# Altium PCB QiTian Mini Remote Control.PcbDoc
Units mm, origin at the board's own origin, x right, y up, seen from the top; angles counter-clockwise.
Board outline 136.4 x 81.28 mm, 2 copper layers (Top Layer, Bottom Layer); 32 components, 21 nets, 128 pads, 9 vias.
Unrouted connection lines stored in the file: 2.
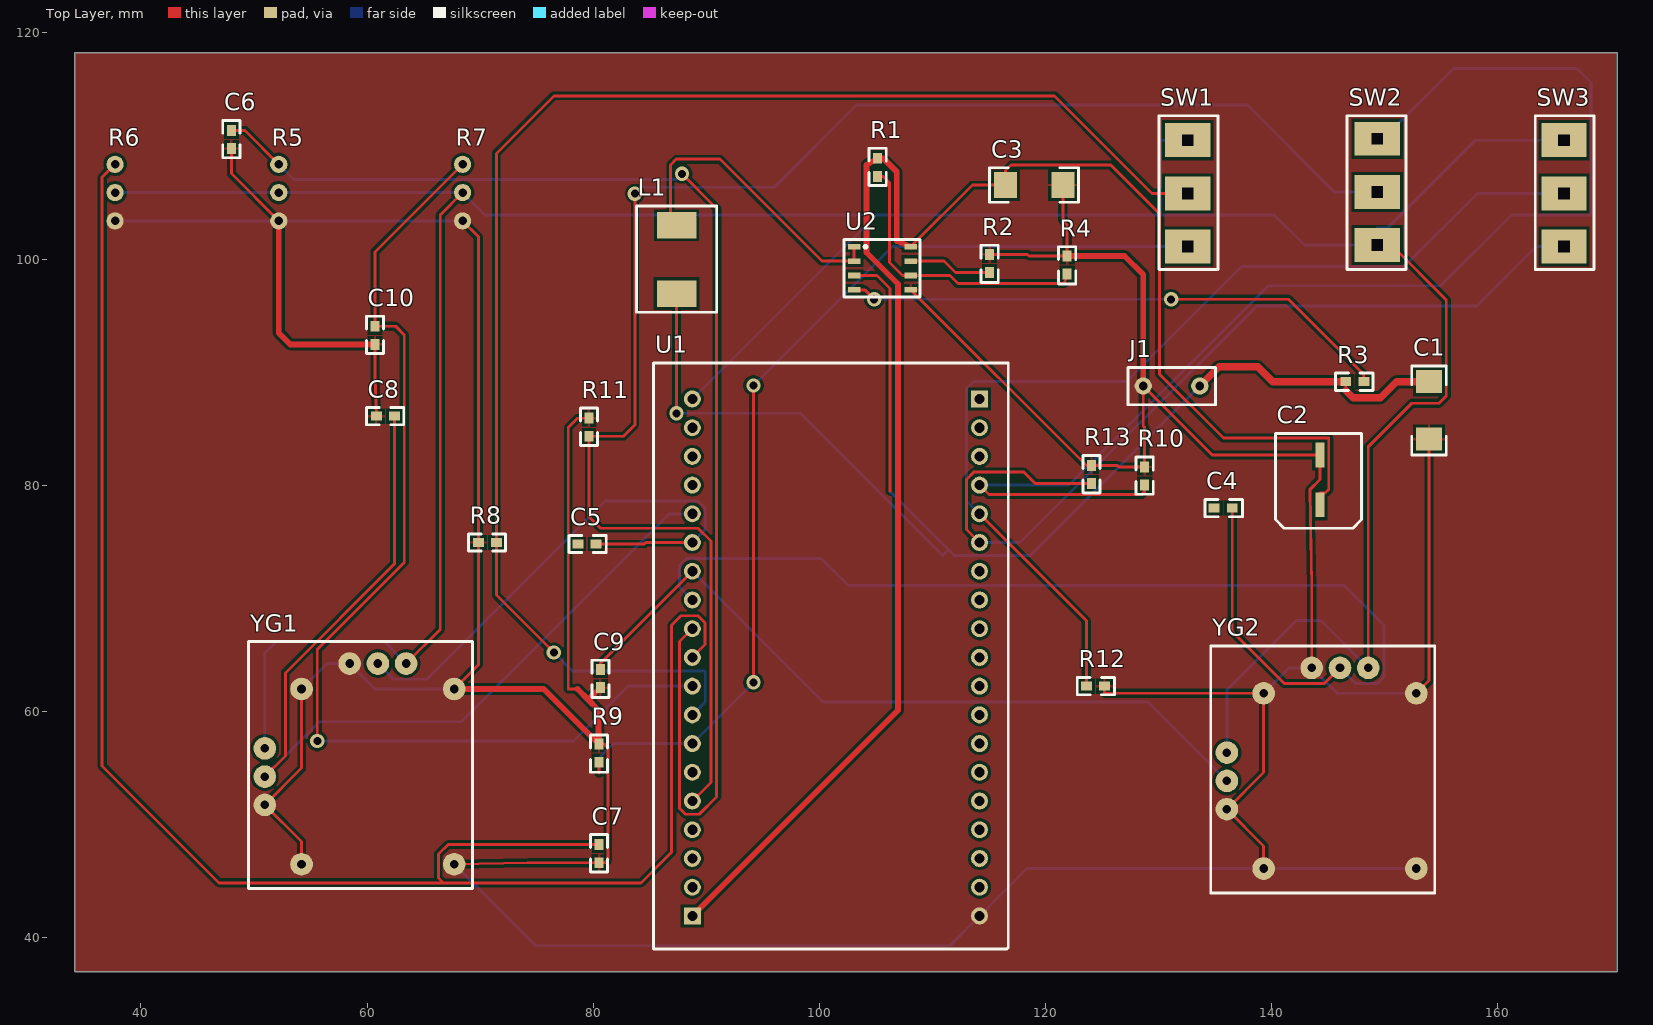
[diagram p0: Top Layer view]
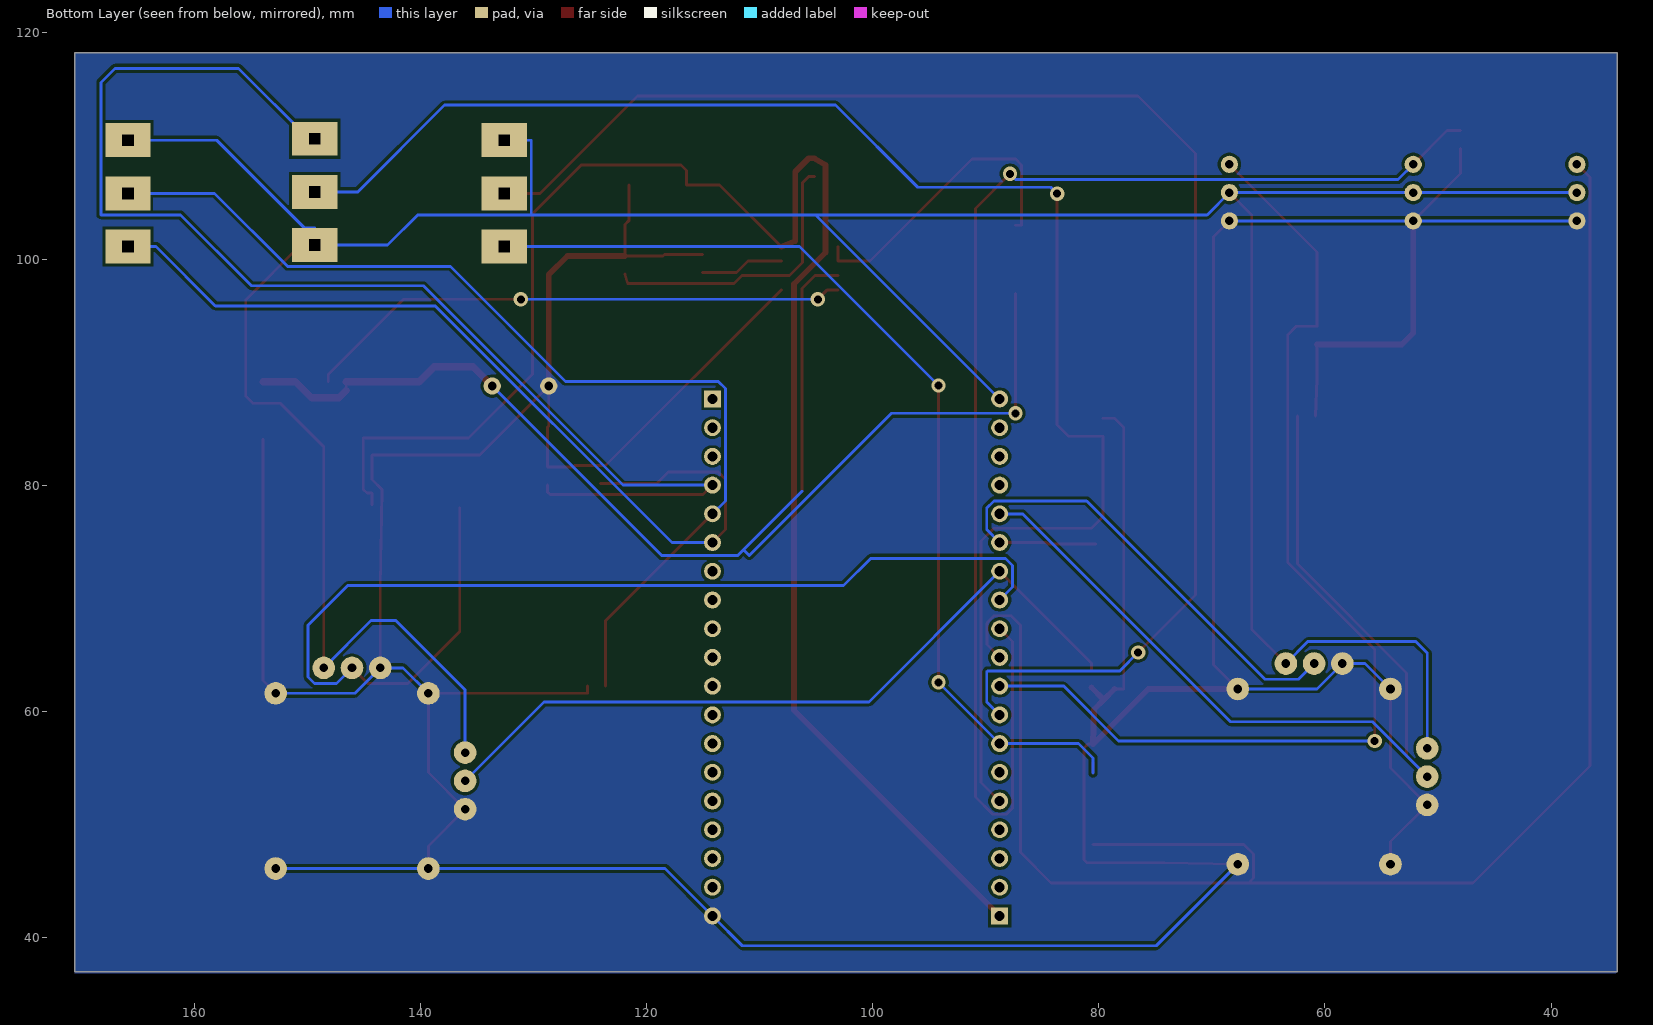
[diagram p1: Bottom Layer view, seen from below]

## Layer stack, top to bottom
Top Solder: solder mask 0.0102, Solder Resist, Dk 3.5
Top Layer: signal copper 0.0356
Dielectric 1: dielectric 0.32, FR-4, Dk 4.8
Bottom Layer: signal copper 0.0356
Bottom Solder: solder mask 0.0102, Solder Resist, Dk 3.5

## Board outline
34.163,36.957 170.561,36.957 170.561,118.237 34.163,118.237

## Design rules (kind name [scope] priority, off if disabled: settings)
Clearance [All] p1: gap=0.254 ignorepadtopadclearanceinfootprint=FALSE except(0: Arc-Hole Track-Hole SMDPad-Hole THPad-Hole Via-Hole Fill-Hole Poly-Hole Region-Hole Text-Hole)
PolygonConnect [All] p1: thpad.connectstyle=Direct thpad.reliefconductorwidth=0.254 thpad.reliefentries=4 thpad.polygonreliefangle="90 Angle" thpad.airgapwidth=0.254 smdpad.connectstyle=Relief smdpad.reliefconductorwidth=0.254 smdpad.reliefentries=4 smdpad.polygonreliefangle="90 Angle" smdpad.airgapwidth=0.254 via.connectstyle=Direct via.reliefconductorwidth=0.254 via.reliefentries=4 via.polygonreliefangle="90 Angle" via.airgapwidth=0.254
RoutingVias [All] p1: holewidth=0.711 width=1.27 viastyle="Through Hole" minholewidth=0.711 minwidth=1.27 maxholewidth=0.711 maxwidth=1.27
SolderMaskExpansion [All] p1: expansion=0.102 istentingtop=FALSE
Width Width_VCC [InNet('VCC')] p1: maxlimit=0.762 minlimit=0.254 preferedwidth=0.508
Width Width_GND [InNet('GND')] p2: maxlimit=0.762 minlimit=0.254 preferedwidth=0.508
Width Width_3.3V [InNet('3.3V')] p3: maxlimit=0.762 minlimit=0.254 preferedwidth=0.508
Width Width_5V [InNet('5V')] p4: maxlimit=0.762 minlimit=0.254 preferedwidth=0.508
Width [All] p5: maxlimit=0.254 minlimit=0.254 preferedwidth=0.254
30 further rules are at their usual default settings.

## Components (designator, comment, footprint, x,y, rotation, side; value= is the part's Value field where it differs from the comment)
C1 "22μF" 6032 153.924,89.154 r270 top
C2 "100μF" 63_54 144.272,82.677 r180 top
C3 "22μF" 6032 121.539,106.553 r180 top
C4 "0.1μF" 0603 136.525,77.978 r180 top
C5 "0.1μF" 0603 80.264,74.803 r180 top
C6 "0.1μF" 0603 48.006,111.379 r270 top
C7 "0.1μF" 0603 80.518,48.209 r270 top
C8 "0.1μF" 0603 60.833,86.106 r0 top
C9 "0.1μF" 0603 80.645,62.103 r90 top
C10 "0.1μF" 0603 60.706,94.056 r270 top
J1 "J_2" J_2 133.651,88.773 r180 top
L1 "3.3μH" 0630 87.376,96.947 r90 top
R1 "73K" 0603 105.156,108.915 r270 top
R2 "28K" 0603 115.062,98.806 r90 top
R3 "100K" 0603 146.558,89.154 r0 top
R4 "10K" 0603 121.92,98.679 r90 top
R5 "RH" RH3 52.197,103.378 r90 top
R6 "RH" RH3 37.719,103.378 r90 top
R7 "RH" RH3 68.453,103.378 r90 top
R8 "10K" 0603 69.85,74.93 r0 top
R9 "10K" 0603 80.518,55.499 r90 top
R10 "10K" 0603 128.778,81.61 r270 top
R11 "10K" 0603 79.629,85.928 r270 top
R12 "10K" 0603 125.222,62.23 r180 top
R13 "10K" 0603 124.079,81.737 r270 top
SW1 "SW_3" SW3 132.588,110.514 r270 top
SW2 "SW_3" SW3 149.352,101.243 r90 top
SW3 "SW_3" SW3 165.862,110.514 r270 top
U1 "ESP32" ESP32 101.854,64.262 r0 top
U2 "FP6277" FP6277 103.077,101.092 r270 top
YG1 "YG" YG 60.96,54.229 r0 top
YG2 "YG" YG 146.05,53.848 r0 top

## Footprints (in the part's own frame and the unit in brackets; to place one, negate y for a bottom-side part, rotate by r counter-clockwise, add the part's x,y. Pads: shape width x height; smd on the part's side, far side on the other; paste and mask are expansions set on the pad)
63_54 [mm] "6.3*5.4mm电容"
  rect 0.8x2.2 smd: 1(0,0) 2(0,4.4)
  silkscreen extent -3.68,-1.91 3.94,6.48
0603 [mm] "0603封装"
  rect 0.965x0.8 smd: 1(0,0) 2(1.6,0)
  silkscreen extent -0.89,-0.76 2.41,0.76
0630 [mm]
  rect 2.35x3.5 smd: 1(0,0) 2(6.05,0)
  silkscreen extent -1.65,-3.56 7.75,3.56
6032 [mm]
  rect 2.03x2.28 smd: 1(0,0) 2(5.08,0)
  silkscreen extent -1.4,-1.52 6.48,1.52
ESP32 [mm] "ESP 开发底板"
  round 1.5 hole 0.9: 1(-13.081,23.368) 2(-13.081,20.828) 3(-13.081,18.288) 4(-13.081,15.748) 5(-13.081,13.208) 6(-13.081,10.668) 7(-13.081,8.128) 8(-13.081,5.588) 9(-13.081,3.048) 10(-13.081,0.508) 11(-13.081,-2.032) 12(-13.081,-4.572) 13(-13.081,-7.112) 14(-13.081,-9.652) 15(-13.081,-12.192) 16(-13.081,-14.732) 17(-13.081,-17.272) 18(-13.081,-19.812) 20(12.319,-22.352) 21(12.319,-19.812) 22(12.319,-17.272) 23(12.319,-14.732) 24(12.319,-12.192) 25(12.319,-9.652) 26(12.319,-7.112) 27(12.319,-4.572) 28(12.319,-2.032) 29(12.319,0.508) 30(12.319,3.048) 31(12.319,5.588) 32(12.319,8.128) 33(12.319,10.668) 34(12.319,13.208) 35(12.319,15.748) 36(12.319,18.288) 37(12.319,20.828)
  rect 1.5x1.5 hole 0.9: 19(-13.081,-22.352) 38(12.319,23.368)
  silkscreen extent -16.51,-25.27 14.86,26.54
FP6277 [mm]
  rect 0.5x1.1 smd: 1(0,0) 2(1.27,0) 3(2.54,0) 4(3.81,0) 5(3.81,5) 6(2.54,5) 7(1.27,5) 8(0,5)
  silkscreen extent -0.64,-0.89 4.44,5.84
J_2 [mil] "2端口接口"
  round 60 hole 30: 1(0,0) 2(196.85,0)
  silkscreen extent -55,-65 250,65
RH3 [mil]
  round 60 hole 30: 1(0,0) 2(98.43,0) 3(196.85,0)
SW3 [mm]
  rect 3x4 hole 1 square: 1(0,0) 2(4.7,0) 3(9.4,0)
  silkscreen extent -2.16,-2.54 11.43,2.67
YG [mm]
  round 2 hole 0.762: 1(-10,-2.5) 2(-10,0) 3(-10,2.5) 4(-2.5,10) 5(0,10) 6(2.5,10) 7(-6.75,7.75) 8(6.75,7.75) 9(-6.75,-7.75) 10(6.75,-7.75)
  silkscreen extent -11.43,-9.91 8.38,11.94

## Part data
C1 C3 C4 C5 C6 C7 C8 C9 C10: library part C
C2: library part C_1, "电解电容"
L1: library part L
R1 R2 R3 R4 R8 R9 R10 R11 R12 R13: library part R
R5 R6 R7: "可调电阻"
SW1 SW2 SW3: "三段开关"
U1: library part U_ESP32, "ESP32开发底板"
U2: library part U_FP6277, "5V 3A升压芯片"
YG1 YG2: "摇杆"

## Via types
v1: diameter 1.27, hole 0.711, Top Layer to Bottom Layer, 9 vias

## Nets (pads, with @x,y where several pads share a name; then routed paths per layer and width w, separated by ;. In a path a pad name is that pad's centre, name@x,y a point inside that pad or via, vN(x,y) a via of type N, cw(c..) or ccw(c..) an arc to the next point about the centre after c; other vN are vias at no path point)
3.3V: R5.2 R6.2 R7.2 SW1.1 SW2.1 SW3.1 U1.1 YG1.3 YG1.6 YG2.3 YG2.6 | length 299.9
  Top Layer w0.254: YG1.6 66.472,67.241 66.472,103.897 R7.2 ; YG2.6 148.55,83.399 152.4,87.249 154.813,87.249 155.448,87.884 155.448,96.391 150.597,101.243 SW2.1
  Bottom Layer w0.254: R6.2 R5.2 R7.2 70.42,103.911 105.054,103.911 ; YG1.3 50.96,65.151 51.976,66.167 61.522,66.167 YG1.6 ; U1.1 105.054,103.911 ; SW1.1 130.2,110.514 130.2,103.911 ; YG2.3 136.05,61.907 142.178,68.036 144.362,68.036 YG2.6 ; SW3.1 158.013,110.514 150.268,102.768 149.352,102.768 SW2.1 142.902,101.243 140.233,103.911 130.2,103.911 ; 105.054,103.911 130.2,103.911
5V: C2.2 C3.2 R1.1 U1.19 U2.8 | length 151.4
  Top Layer w0.254: U2.8 113.538,106.553 C3.2 116.459,107.823 116.967,108.331 125.781,108.331 130.099,104.013 130.099,89.814 135.738,84.176 145.059,84.176 145.059,79.629 144.729,79.299 144.272,79.299 C2.2
  Top Layer w0.508: U1.19 106.955,60.092 106.955,97.794 104.165,100.584 104.165,108.331 R1.1 105.664,108.915 106.858,107.721 106.858,101.6 U2.8
AC1: C8.2 U1.5 YG1.2 | length 84.1
  Top Layer w0.254: YG1.2 52.781,56.05 52.781,63.398 62.433,73.05 C8.2
  Bottom Layer w0.254: YG1.2 55.811,59.08 68.352,59.08 86.741,77.47 U1.5
AC2: C5.1 U1.6 YG1.5 | length 48.4
  Top Layer w0.254: C5.1 84.531,74.803 84.658,74.93 U1.6
  Bottom Layer w0.254: YG1.5 62.349,62.84 65.303,62.84 81.077,78.613 89.281,78.613 89.916,77.978 89.916,76.073 U1.6
AC3: C9.2 U1.7 YG2.2 | length 67
  Top Layer w0.254: C9.2 80.645,64.262 U1.7
  Bottom Layer w0.254: U1.7 100.33,60.833 129.065,60.833 YG2.2
AC4: C4.1 U1.8 YG2.5 | length 100.7
  Top Layer w0.254: C4.1 136.525,67.056 141.122,62.459 144.661,62.459 YG2.5
  Bottom Layer w0.254: U1.8 87.63,70.993 87.63,72.898 88.265,73.533 100.178,73.533 102.591,71.12 146.431,71.12 149.936,67.615 149.936,63.043 149.36,62.467 147.431,62.467 YG2.5
AC5: C6.1 R5.3 U1.9 | length 118.7
  Top Layer w0.254: C6.1 49.196,111.379 R5.3 ; v1(87.859,107.544) 90.92,104.482 90.92,52.439 89.383,50.902 88.163,50.902 87.63,51.435 87.63,66.167 U1.9
  Bottom Layer w0.254: R5.3 53.539,107.036 87.351,107.036 v1(87.859,107.544)
AC6: C7.1 R6.3 U1.10 | length 153.9
  Top Layer w0.254: R6.3 36.576,107.235 36.576,55.169 46.914,44.831 66.751,44.831 ; C7.1 67.157,48.209 66.319,47.371 66.319,45.263 66.751,44.831 ; U1.10 89.904,65.901 89.904,67.83 89.281,68.453 87.757,68.453 86.944,67.64 86.944,47.549 84.226,44.831 66.751,44.831
AC7: C10.1 R7.3 U1.11 | length 94.7
  Top Layer w0.254: v1(55.601,57.379) 55.601,65.481 63.297,73.177 63.297,93.294 62.535,94.056 C10.1 60.706,100.631 R7.3
  Bottom Layer w0.254: v1(55.601,57.379) 78.257,57.379 83.109,62.23 U1.11
CH1: R8.2 SW1.2 U1.12 | length 131.4
  Top Layer w0.254: v1(76.53,65.202) 71.45,70.282 R8.2 71.45,109.347 76.53,114.427 120.8,114.427 129.413,105.814 SW1.2
  Bottom Layer w0.254: v1(76.53,65.202) 78.156,63.576 89.84,63.576 89.916,63.5 89.916,60.833 U1.12
CH2: R9.1 SW1.3 U1.13 | length 88.5
  Top Layer w0.254: 80.518,54.534 R9.1 ; v1(94.183,62.56) v1(94.183,88.824)
  Bottom Layer w0.254: 80.518,54.534 80.518,55.88 81.788,57.15 U1.13 v1(94.183,62.56) ; v1(94.183,88.824) 106.473,101.113 SW1.3
CH3: R11.2 SW2.2 U1.15 | length 139.5
  Top Layer w0.254: v1(83.693,105.791) 83.693,85.344 82.677,84.328 R11.2 79.629,77.216 80.645,76.2 89.281,76.2 90.412,75.069 90.412,53.709 U1.15
  Bottom Layer w0.254: v1(83.693,105.791) 84.252,106.35 96.012,106.35 103.276,113.614 137.87,113.614 145.542,105.942 SW2.2
CH4: R10.2 SW2.3 U1.35 | length 113.3
  Top Layer w0.254: U1.35 115.011,79.172 128.524,79.172 128.778,79.426 R10.2
  Bottom Layer w0.254: U1.35 122.098,80.01 139.725,97.638 154.94,97.638 161.214,103.911 168.25,103.911 168.25,115.621 167.005,116.865 156.083,116.865 149.86,110.643 SW2.3
CH5: R12.2 SW3.2 U1.34 | length 90.7
  Top Layer w0.254: U1.34 123.622,68.021 R12.2
  Bottom Layer w0.254: U1.34 113.03,78.613 113.03,88.544 113.665,89.179 127.178,89.179 137.338,99.339 151.74,99.339 158.214,105.814 SW3.2
CH6: R13.2 SW3.3 U1.33 | length 80.3
  Top Layer w0.254: U1.33 113.03,76.073 113.03,80.518 113.665,81.153 118.11,81.153 119.126,80.137 R13.2
  Bottom Layer w0.254: U1.33 117.754,74.93 138.684,95.86 158.14,95.86 163.394,101.113 SW3.3
GND: C1.2 C2.1 C3.1 C6.2 C7.2 C8.1 C9.1 C10.2 J1.2 R2.2 R4.2 R5.1 R6.1 R7.1 R8.1 R9.2 R10.1 R11.1 R12.1 R13.1 U1.20 U2.5 YG1.1 YG1.4 YG1.7 YG1.8 YG1.9 YG1.10 YG2.1 YG2.4 YG2.7 YG2.8 YG2.9 YG2.10 | length 477.6
  Top Layer w0.254: C6.2 48.006,107.569 R5.1 ; YG1.9 54.21,48.479 YG1.1 54.21,54.979 YG1.7 ; C10.2 60.706,89.408 C8.1 ; YG1.10 74.247,46.609 C7.2 81.051,46.609 81.305,46.863 81.305,56.769 80.975,57.099 R9.2 ; YG1.8 69.85,64.119 R8.1 69.85,101.981 R7.1 ; 78.613,61.979 77.8,61.979 77.8,85.115 78.613,85.928 R11.1 ; U2.5 123.622,81.737 R13.1 126.365,81.737 126.492,81.61 R10.1 128.778,85.115 128.651,85.242 J1.2 134.747,82.677 C2.1 144.272,80.493 143.383,79.604 143.55,70.978 YG2.4 ; R2.2 118.415,100.406 118.542,100.279 R4.2 121.92,103.048 121.539,103.429 C3.1 ; R12.1 125.222,61.598 YG2.7 139.3,54.598 YG2.1 139.3,48.098 YG2.9 ; YG2.8 153.924,62.722 C1.2
  Top Layer w0.508: R5.1 52.197,93.472 53.213,92.456 C10.2 ; YG1.8 75.638,61.979 R9.2 80.435,60.157 79.567,61.025 ; 78.613,61.979 79.567,61.025 ; C9.1 79.567,61.025 ; R4.2 127,100.279 128.651,98.628 J1.2
  Bottom Layer w0.254: R6.1 R5.1 R7.1 ; YG1.7 56.46,64.229 YG1.4 60.71,61.979 YG1.8 ; YG1.10 74.921,39.268 111.531,39.268 U1.20 118.361,46.098 YG2.9 YG2.10 ; YG2.7 141.55,63.848 YG2.4 145.8,61.598 YG2.8
NetL1_2: L1.2 U2.1 U2.2 | length 27.3
  Top Layer w0.254: L1.2 86.843,102.997 86.843,108.331 87.351,108.839 91.211,108.839 100.228,99.822 U2.2 U2.1
NetR1_2: R1.2 R4.1 U2.6 | length 25.4
  Top Layer w0.254: R1.2 105.664,107.315 106.223,106.756 106.223,99.695 107.366,98.552 U2.6 111.557,98.552 112.268,97.841 121.666,97.841 R4.1
NetR2_1: R2.1 U2.7 | length 7.4
  Top Layer w0.254: U2.7 111.023,99.822 112.039,98.806 R2.1
NetR3_2: R3.2 U2.4 | length 48.8
  Top Layer w0.254: U2.4 104.013,97.282 v1(104.851,96.444) ; v1(131.115,96.444) 141.503,96.444 148.158,89.789 R3.2
  Bottom Layer w0.254: v1(104.851,96.444) v1(131.115,96.444)
VCC: C1.1 J1.1 L1.1 R3.1 U2.3 | length 120.8
  Top Layer w0.254: v1(87.376,86.36) L1.1 ; U2.3 105.105,98.552 106.257,97.4 106.257,79.468 ; 146.558,88.367 R3.1
  Top Layer w0.635: J1.1 135.353,90.475 138.785,90.475 140.106,89.154 R3.1 ; 146.558,88.367 147.193,87.732 149.631,87.732 151.054,89.154 C1.1
  Bottom Layer w0.254: v1(87.376,86.36) 98.349,86.36 110.922,73.787 111.43,74.295 ; 106.257,79.468 111.43,74.295 ; J1.1 118.665,73.787 111.938,73.787 111.43,74.295
pads on no net: C4.2 C5.2 U1.2 U1.3 U1.4 U1.14 U1.16 U1.17 U1.18 U1.21 U1.22 U1.23 U1.24 U1.25 U1.26 U1.27 U1.28 U1.29 U1.30 U1.31 U1.32 U1.36 U1.37 U1.38

## Polygon pours and split planes (outlines as drawn)
GND on Bottom Layer "GND_L02_P001" (solid, remove dead copper, pour order 1): 34.163,118.237 170.561,118.237 170.561,36.83 34.29,36.83 34.163,36.957
GND on Top Layer "GND_L01_P000" (solid, remove dead copper, pour order 0): 34.163,118.237 170.434,118.237 170.434,37.084 170.307,36.957 34.163,36.957

## Silkscreen, mask and mechanical layers (free items; w line width, h text height)
Drill Drawing: